# EAGLE board Extrudrboard (EAGLE 6.2)
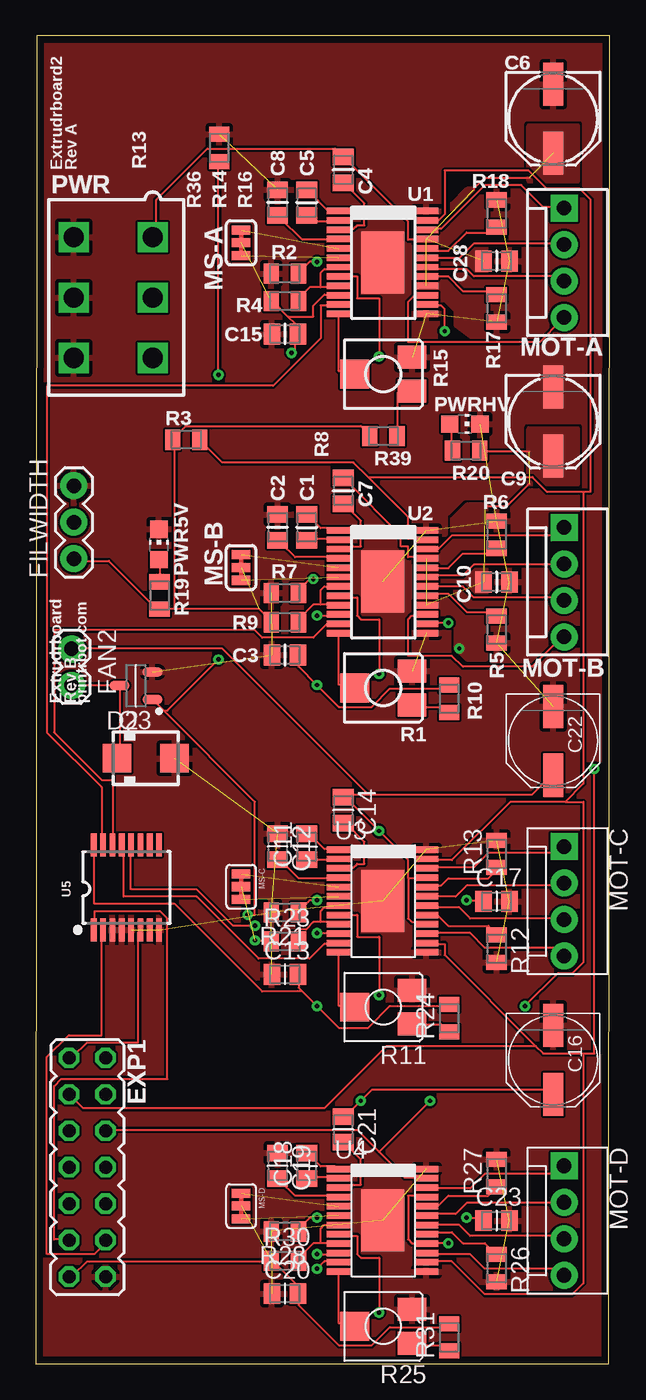
[diagram p0: board, top side]
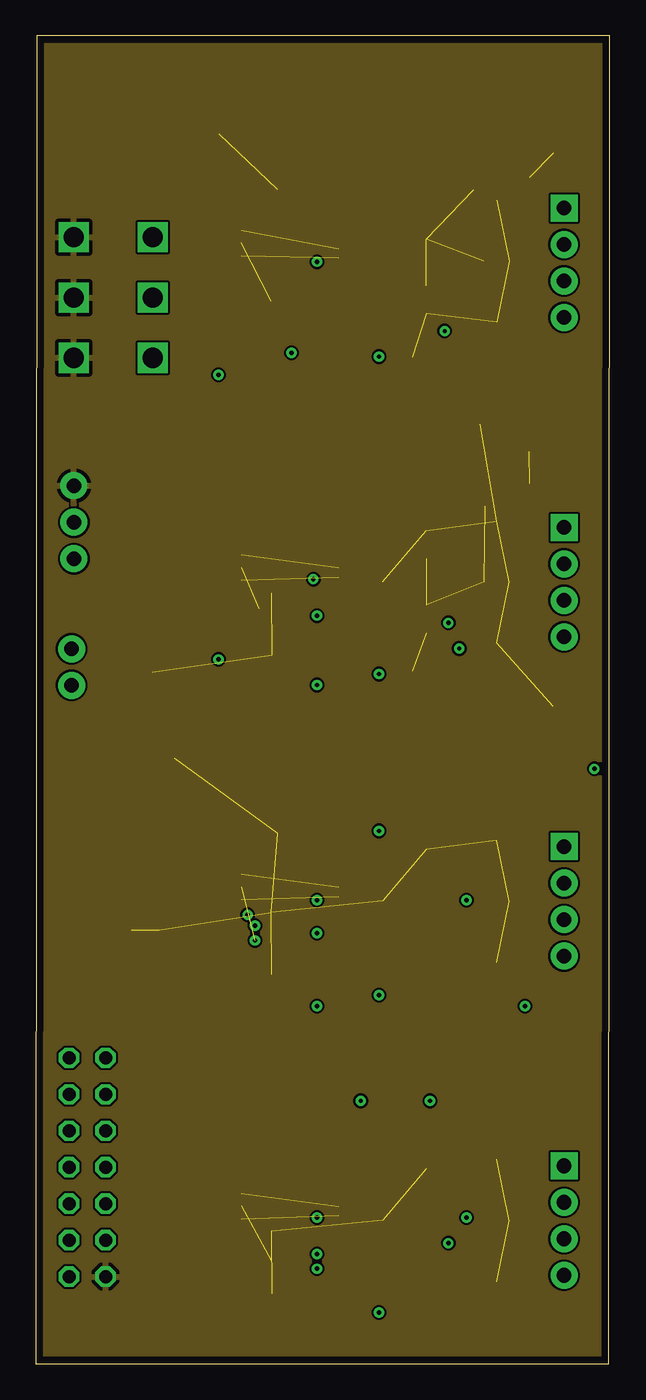
[diagram p1: board, inner layer GND]
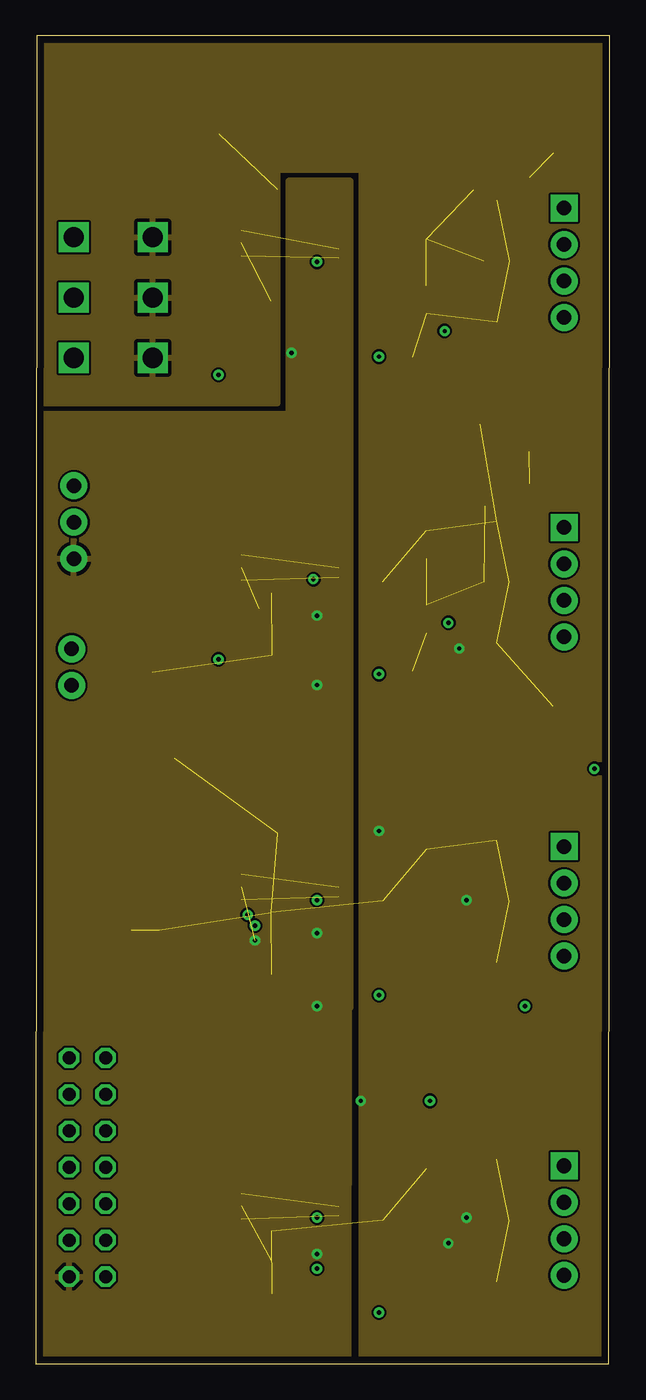
[diagram p2: board, inner layer PWR]
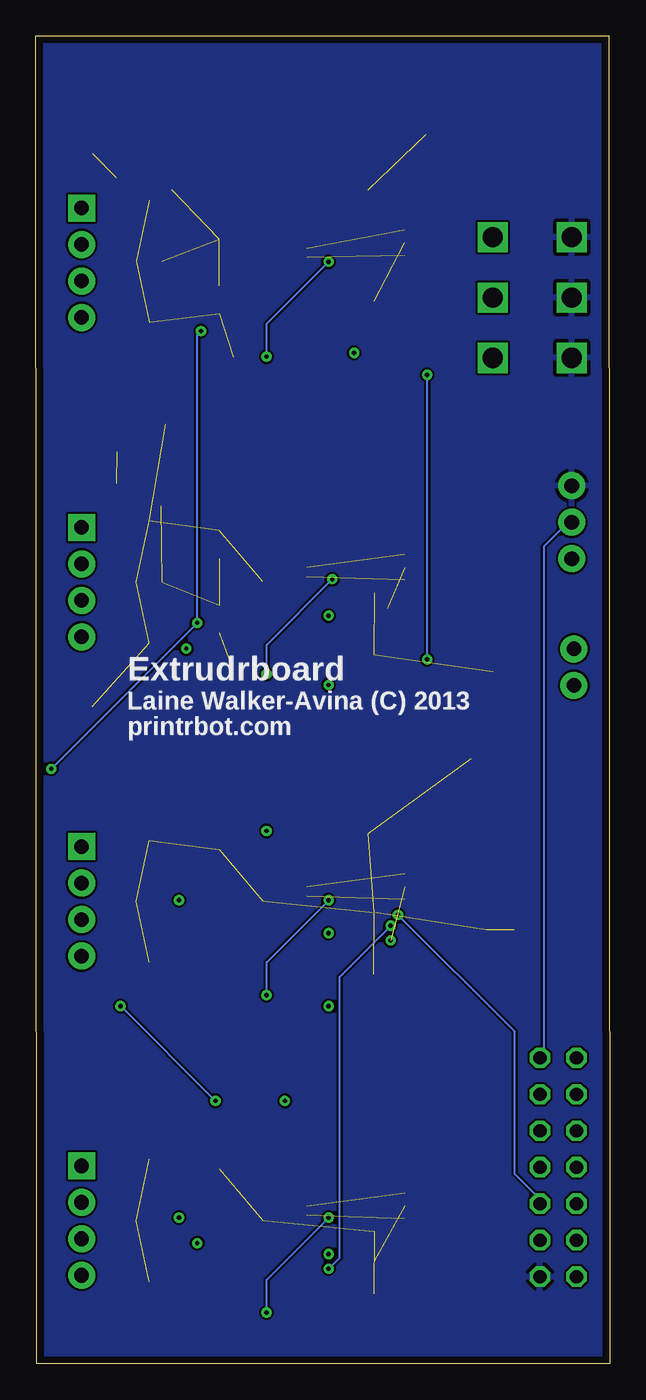
[diagram p3: board, bottom side, seen from below]

Size 39.93 x 92.43 mm. Coordinates in mm from the lower left corner, seen from the top.
Outline: 0,0 39.88,0 39.93,92.43 0.05,92.43 0,0
Copper layers (1*2+3*16): Top 0.035mm / dielectric 0.6mm / GND 0.035mm / dielectric 0.2mm / PWR 0.035mm / dielectric 0.6mm / Bottom 0.035mm
Design rules: minimum track width 6mil, minimum drill 12mil, track to track 6mil, track to pad 7mil, pad to pad 6mil, via to via 6mil, smd to smd 0mil, copper to edge 20mil, drill to drill 10mil, minimum pad ring 10mil, minimum via ring 8mil, stop-mask expansion 6mil, vias tented up to drill 100mil, thermal gap 10mil

## Footprints (pad centres in the part's own frame; a part is rotated, then mirrored left to right if it is on the bottom)
CAPC2012X145AN = smd 1.15 x 1.45: 1 -0.9,0; 2 0.9,0
PANASONIC_D = smd 3 x 1.4: + 2.4,0; - -2.4,0
SMA = smd 2 x 2: A 2,0; C -2,0
JP7Q = drill 0.914 octagon: 1 -7.62,-1.27; 2 -7.62,1.27; 3 -5.08,-1.27; 4 -5.08,1.27; 5 -2.54,-1.27; 6 -2.54,1.27; 7 0,-1.27; 8 0,1.27; 9 2.54,-1.27; 10 2.54,1.27; 11 5.08,-1.27; 12 5.08,1.27; 13 7.62,-1.27; 14 7.62,1.27
1X02 = drill 1.016 pad 1.88: 1 0,0; 2 2.54,0
1X03 = drill 1.016 pad 1.88: 1 0,0; 2 2.54,0; 3 5.08,0
MOLEX-1X4 = drill 1.016 pad 1.88 square: 1 0,0 | drill 1.016 pad 1.88: 2 2.54,0; 3 5.08,0; 4 7.62,0
SJ_3_CONNECTED = smd 0.635 x 1.27: 1 -0.889,0; 2 0,0; 3 0.889,0
5566-6 = drill 1.4 square: 1 4.2,-2.75; 2 0,-2.75; 3 -4.2,-2.75; 4 4.2,2.75; 5 0,2.75; 6 -4.2,2.75
CHIP-LED0805 = smd 1.2 x 1.2: A 0,-1.05; C 0,1.05
SOT95P280X135-3N = smd 1.4 x 0.65: 1 -1.15,0.95; 2 -1.15,-0.95; 3 1.15,0
RTRIM-ST4ETB = smd 1.6 x 2: 1 -1.175,-2; 2 1.175,-2 | smd 2 x 2: W 0,2
RESC2012X70N = smd 1.05 x 1.4: 1 -0.95,0; 2 0.95,0
TSSOP-24 = smd 0.45 x 1.65: 1 -3.6,-3.1; 2 -2.95,-3.1; 3 -2.3,-3.1; 4 -1.65,-3.1; 5 -1,-3.1; 6 -0.35,-3.1; 7 0.3,-3.1; 8 0.95,-3.1; 9 1.6,-3.1; 10 2.25,-3.1; 11 2.9,-3.1; 12 3.55,-3.1; 13 3.55,3; 14 2.9,3; 15 2.25,3; 16 1.6,3; 17 0.95,3; 18 0.3,3; 19 -0.35,3; 20 -1,3; 21 -1.65,3; 22 -2.3,3; 23 -2.95,3; 24 -3.6,3 | smd 4.32 x 3: PAD -0.025,-0.05
TSSOP16 = smd 0.4 x 1.6: 1 -2.225,-2.85; 2 -1.575,-2.85; 3 -0.925,-2.85; 4 -0.275,-2.85; 5 0.375,-2.85; 6 1.025,-2.85; 7 1.675,-2.85; 8 2.325,-2.85; 9 2.325,3.05; 10 1.675,3.05; 11 1.025,3.05; 12 0.375,3.05; 13 -0.275,3.05; 14 -0.925,3.05; 15 -1.575,3.05; 16 -2.225,3.05

## Placement (x,y rotation side)
C1  0.1uF  [CAPC2012X145AN]  18.85,58.22 90 top
C2  0.22uF  [CAPC2012X145AN]  16.81,58.22 270 top
C3  10uF  [CAPC2012X145AN]  17.32,49.33 0 top
C4  0.1uF  [CAPC2012X145AN]  21.39,83.11 270 top
C5  0.1uF  [CAPC2012X145AN]  18.85,80.82 90 top
C6  100uF  [PANASONIC_D]  35.99,86.66 270 top
C7  0.1uF  [CAPC2012X145AN]  21.39,60.76 270 top
C8  0.22uF  [CAPC2012X145AN]  16.81,80.82 270 top
C9  100uF  [PANASONIC_D]  35.99,65.58 270 top
C10  0.1uF  [CAPC2012X145AN]  32.05,54.41 0 top
C11  0.1uF  [CAPC2012X145AN]  18.85,35.99 90 top
C12  0.22uF  [CAPC2012X145AN]  16.81,35.99 270 top
C13  10uF  [CAPC2012X145AN]  17.32,27.1 0 top
C14  0.1uF  [CAPC2012X145AN]  21.39,38.53 270 top
C15  10uF  [CAPC2012X145AN]  17.32,71.68 0 top
C16  100uF  [PANASONIC_D]  35.99,21.13 270 top
C17  0.1uF  [CAPC2012X145AN]  32.05,32.18 0 top
C18  0.1uF  [CAPC2012X145AN]  18.85,13.77 90 top
C19  0.22uF  [CAPC2012X145AN]  16.81,13.77 270 top
C20  10uF  [CAPC2012X145AN]  17.32,4.88 0 top
C21  0.1uF  [CAPC2012X145AN]  21.39,16.31 270 top
C22  100uF  [PANASONIC_D]  35.99,43.36 270 top
C23  0.1uF  [CAPC2012X145AN]  32.05,9.96 0 top
C28  0.1uF  [CAPC2012X145AN]  32.05,76.76 0 top
D2  [SMA]  7.65,42.14 0 top
EXP1  PB-E1  [JP7Q]  3.58,13.67 270 top
FAN2  FAN  [1X02]  2.49,49.76 270 top
FILWIDTH  FILWIDTH  [1X03]  2.64,56.03 90 top
MOT-A  MOT-A  [MOLEX-1X4]  36.75,80.44 270 top
MOT-B  MOT-B  [MOLEX-1X4]  36.75,58.22 270 top
MOT-C  MOT-C  [MOLEX-1X4]  36.75,35.99 270 top
MOT-D  MOT-D  [MOLEX-1X4]  36.75,13.77 270 top
MS-A  [SJ_3_CONNECTED]  14.27,78.03 270 top
MS-B  [SJ_3_CONNECTED]  14.27,55.42 270 top
MS-C  [SJ_3_CONNECTED]  14.27,33.2 270 top
MS-D  [SJ_3_CONNECTED]  14.27,10.97 270 top
PWR  5566-6  [5566-6]  5.38,74.22 90 top
PWR5V  PWR  [CHIP-LED0805]  8.56,57.03 0 top
PWRHV  PWR  [CHIP-LED0805]  29.86,65.41 270 top
Q3  RFP30N06LE  [SOT95P280X135-3N]  6.96,47.19 180 top
R1  10k  [RTRIM-ST4ETB]  24.18,47.04 90 top
R2  10k  [RESC2012X70N]  17.32,75.87 180 top
R3  100k  [RESC2012X70N]  10.46,64.31 0 top
R4  100k  [RESC2012X70N]  17.32,73.96 0 top
R5  0.11  [RESC2012X70N]  32.05,51.1 270 top
R6  0.11  [RESC2012X70N]  32.05,57.71 90 top
R7  10k  [RESC2012X70N]  17.32,53.64 180 top
R9  100k  [RESC2012X70N]  17.32,51.61 0 top
R10  20k  [RESC2012X70N]  28.75,46.28 90 top
R11  10k  [RTRIM-ST4ETB]  24.18,24.82 90 top
R12  0.11  [RESC2012X70N]  32.05,28.88 270 top
R13  0.11  [RESC2012X70N]  32.05,35.48 90 top
R14  100k  [RESC2012X70N]  12.75,84.63 90 top
R15  10k  [RTRIM-ST4ETB]  24.18,68.88 90 top
R17  0.11  [RESC2012X70N]  32.05,73.46 270 top
R18  0.11  [RESC2012X70N]  32.05,80.06 90 top
R19  330  [RESC2012X70N]  8.6,53.48 270 top
R20  1k  [RESC2012X70N]  29.94,63.55 0 top
R21  10k  [RESC2012X70N]  17.32,31.42 180 top
R23  100k  [RESC2012X70N]  17.32,29.39 0 top
R24  20k  [RESC2012X70N]  28.75,24.05 90 top
R25  10k  [RTRIM-ST4ETB]  24.18,2.59 90 top
R26  0.11  [RESC2012X70N]  32.05,6.65 270 top
R27  0.11  [RESC2012X70N]  32.05,13.26 90 top
R28  10k  [RESC2012X70N]  17.32,9.19 180 top
R30  100k  [RESC2012X70N]  17.32,7.16 0 top
R31  20k  [RESC2012X70N]  28.75,1.83 90 top
R39  20k  [RESC2012X70N]  24.18,64.57 180 top
U1  A4982  [TSSOP-24]  24.18,76.63 270 top
U2  A4982  [TSSOP-24]  24.18,54.41 270 top
U3  A4982  [TSSOP-24]  24.18,32.18 270 top
U4  A4982  [TSSOP-24]  24.18,9.96 270 top
U5  MC74HC238ADTR2G  [TSSOP16]  6.25,33.05 0 top

## Library data of the parts
C1-C5 C7 C8 C10-C15 C17-C21 C23 C28 = ipc-7351-capacitor
C6 C9 C16 C22 = rcl
D2 EXP1 MS-A MS-B MS-C MS-D R1 R11 R15 R25 U1-U4 = printrbot
FAN2 FILWIDTH MOT-A MOT-B MOT-C MOT-D = SparkFun
PWR = printrbot; MPN: 95566-61002; OC_FARNELL: unknown; OC_NEWARK: 22K8620
PWR5V PWRHV = led
Q3 = ipc-7351-transistor
R2-R7 R9 R10 R12-R14 R17-R21 R23 R24 R26-R28 R30 R31 R39 = ipc-7351-resistor
U5 = mux

## Nets
12V: C4.1 C6.+ C7.1 C9.+ C10.1 C14.1 C16.+ C17.1 C21.1 C22.+ C23.1 C28.1 FAN2.1 PWR.1 PWR.2 PWR.3 R20.2 U1.16 U1.21 U2.16 U2.21 U3.16 U3.21 U4.16 U4.21
!E-ENABLE: EXP1.6 R3.2 U1.23 U2.23 U3.23 U4.23
!PWM-FAN2: EXP1.10 Q3.1 R14.1
+5V [power]: C3.2 C13.2 C15.2 C20.2 EXP1.13 FILWIDTH.1 MS-A.2 MS-B.2 MS-C.2 MS-D.2 R3.1 R4.1 R9.1 R10.2 R19.2 R23.1 R24.2 R30.1 R31.2 R39.2 U1.10 U2.10 U3.10 U4.10 U5.16
A-STEP: U1.11 U5.15
B-STEP: U2.11 U5.14
C-STEP: U3.11 U5.13
D-STEP: U4.11 U5.12
E-DIR: EXP1.3 U1.14 U2.14 U3.14 U4.14
E-MUX0: EXP1.11 U5.1
E-MUX1: EXP1.12 U5.2
E-STEP: EXP1.1 U5.6
FILWIDTH: EXP1.2 FILWIDTH.2
GND [power]: C2.1 C3.1 C6.- C8.1 C9.- C10.2 C12.1 C13.1 C15.1 C16.- C17.2 C19.1 C20.1 C22.- C23.2 C28.2 D2.A EXP1.14 FILWIDTH.3 PWR5V.C PWR.4 PWR.5 PWR.6 PWRHV.C Q3.2 R1.2 R2.2 R5.2 R6.2 R7.2 R11.2 R12.2 R13.2 R14.2 R15.2 R17.2 R18.2 R21.2 R25.2 R26.2 R27.2 R28.2 U1.13 U1.24 U1.PAD U2.13 U2.24 U2.PAD U3.13 U3.24 U3.PAD U4.13 U4.24 U4.PAD U5.3 U5.4 U5.5 U5.8
N$1: C1.2 U2.1
N$2: C1.1 U2.2
N$3: R5.1 U2.17
N$4: R6.1 U2.20
N$5: R1.W U2.12
N$6: R7.1 U2.8
N$7: C2.2 U2.4
N$8: R9.2 U2.7 U2.9
N$9: C7.2 U2.3
N$10: MOT-A.3 U1.18
N$11: C5.2 U1.1
N$12: C5.1 U1.2
N$13: R2.1 U1.8
N$14: R17.1 U1.17
N$15: R18.1 U1.20
N$16: C4.2 U1.3
N$17: MOT-A.4 U1.15
N$18: R15.W U1.12
N$19: C8.2 U1.4
N$20: MOT-A.2 U1.19
N$21: R4.2 U1.7 U1.9
N$22: MS-B.1 U2.5
N$23: MOT-A.1 U1.22
N$24: MS-B.3 U2.6
N$25: MOT-B.3 U2.18
N$26: MOT-B.4 U2.15
N$27: MS-A.1 U1.5
N$28: MS-A.3 U1.6
N$29: MOT-B.2 U2.19
N$30: MOT-B.1 U2.22
N$31: R1.1 R10.1
N$33: PWR5V.A R19.1
N$34: PWRHV.A R20.1
N$35: C11.2 U3.1
N$36: C11.1 U3.2
N$37: R12.1 U3.17
N$38: R13.1 U3.20
N$39: R11.W U3.12
N$40: R21.1 U3.8
N$41: C12.2 U3.4
N$42: R23.2 U3.7 U3.9
N$43: C14.2 U3.3
N$44: MS-C.1 U3.5
N$45: MS-C.3 U3.6
N$46: MOT-C.3 U3.18
N$47: MOT-C.4 U3.15
N$48: MOT-C.2 U3.19
N$49: MOT-C.1 U3.22
N$50: R11.1 R24.1
N$51: C18.2 U4.1
N$52: C18.1 U4.2
N$53: R26.1 U4.17
N$54: R27.1 U4.20
N$55: R25.W U4.12
N$56: R28.1 U4.8
N$57: C19.2 U4.4
N$58: R30.2 U4.7 U4.9
N$59: C21.2 U4.3
N$60: MS-D.1 U4.5
N$61: MS-D.3 U4.6
N$62: MOT-D.3 U4.18
N$63: MOT-D.4 U4.15
N$64: MOT-D.2 U4.19
N$65: MOT-D.1 U4.22
N$66: R25.1 R31.1
N$67: D2.C FAN2.2 Q3.3
N$69: R15.1 R39.1

## Tracks (layer width: path | path; a pad name or v marks a point on that pad's centre or on a via)
12V  (via drill 0.3)  (8 unrouted)
  Top 0.152: 25.91,33.78 25.91,35.05 v23.88,37.08 21.59,39.37 C14.1 21.59,39.62 23.11,39.62 | 25.91,33.78 27.18,33.78 U3.21 | 25.91,33.78 25.91,30.99 26.16,30.73 27.18,30.73 U3.16 | 23.11,39.62 34.54,39.62 35.81,40.89 C22.+ | 23.11,39.62 12.95,49.78 2.54,49.78 FAN2.1 | C21.1 21.59,17.27 v22.61,18.29 23.37,19.05 35.56,19.05 35.81,18.8 C16.+ | R20.2 30.99,63.5 34.29,63.5 34.34,63.5 | C7.1 21.59,61.47 25.4,57.66 25.4,56.9 25.91,56.9 25.91,56.13 26.42,56.13 U2.21 | 31.24,59.69 32.77,59.69 34.29,61.21 34.34,61.27 | U1.21 26.42,78.23 25.91,78.23 25.91,79.5 21.59,83.82 C4.1 21.34,84.07 20.83,84.58 11.94,84.58 8.38,81.03 8.38,78.49 PWR.1 | 34.34,82.55 34.29,82.55 31.24,82.55 30.48,81.79 30.48,81.71 | U4.21 27.18,11.68 25.91,11.68 25.91,8.64 26.16,8.38 27.18,8.38 U4.16 27.43,8.38 v28.7,8.38 | v29.97,10.16 30.99,10.16 C23.1 | v29.97,32.26 30.99,32.26 C17.1
  PWR 0.152: v22.61,18.29 22.66,18.29
  other vias: 29.46,49.78
  pour PWR: 0.05,66.85 16.81,66.85 16.81,83.11 22.66,83.11 22.66,0 39.93,0 39.93,92.43 0.05,92.43
  pour Top (no thermals): 31.29,59.74 30.02,59.74 29.01,58.72 29.01,57.2 28.5,56.69 26.47,56.69 26.47,52.12 28.5,52.12 29.26,51.36 29.26,49.83 30.02,49.07 31.29,49.07
  pour Top (no thermals): 31.29,81.71 30.02,81.71 29.01,80.7 29.01,79.17 28.5,78.66 26.47,78.66 26.47,74.09 28.5,74.09 29.26,73.33 29.26,72.31 30.28,71.55 31.29,71.55
  pour Top (no thermals): 34.34,65.07 37.64,65.07 37.64,61.26 34.34,61.26
  pour Top (no thermals): 34.34,86.16 37.64,86.16 37.64,82.35 34.34,82.35
!E-ENABLE  (via drill 0.3)
  Top 0.152: 23.88,14.73 22.35,16.26 5.08,16.26 EXP1.6 | 23.88,14.73 25.65,12.95 27.18,12.95 U4.23 | 23.11,61.72 25.91,58.93 25.91,57.4 27.18,57.4 U2.23 | 23.11,61.72 22.1,62.74 12.95,62.74 11.43,64.26 R3.2 | 36.83,39.12 33.02,39.12 28.96,35.05 27.43,35.05 U3.23 | 36.83,39.12 38.1,40.39 38.1,60.71 | 38.1,60.71 35.56,60.71 34.54,61.72 23.11,61.72 | 38.1,60.71 38.61,60.71 38.61,81.03 37.85,81.79 35.56,81.79 34.29,83.06 28.45,83.06 28.45,80.01 27.94,79.5 27.43,79.5 U1.23 | v27.43,18.29 23.88,14.73 | v34.04,24.89 36.32,27.18 37.34,27.18 38.1,27.94 38.1,39.12 36.83,39.12
  Bottom 0.152: v34.04,24.89 v27.43,18.29
!PWM-FAN2  (via drill 0.3)
  Top 0.152: 8.89,45.47 15.24,39.12 15.24,31.24 v14.73,31.24 | 8.89,45.47 8.13,46.23 Q3.1 | v12.7,68.83 12.7,83.57 R14.1 | v12.7,49.02 9.14,45.47 8.89,45.47
  Bottom 0.152: v14.73,31.24 6.6,23.11 6.6,13.21 5.08,11.68 5.08,11.18 EXP1.10 | v12.7,49.02 v12.7,68.83
+5V  (via drill 0.3)  (4 unrouted)
  Top 0.152: 18.54,25.91 18.29,26.16 18.29,26.92 C13.2 | 18.54,25.91 v19.56,24.89 21.08,23.37 23.11,23.37 24.64,24.89 28.7,24.89 R24.2 | 18.54,25.91 15.75,25.91 9.65,32 4.06,32 4.06,36.07 U5.16 | R31.2 28.7,2.54 24.64,2.54 23.37,1.27 21.08,1.27 18.29,4.06 18.29,4.83 C20.2 18.03,5.08 18.03,5.59 16.51,7.11 R30.1 16.26,7.11 3.56,7.11 2.54,6.1 EXP1.13 | R10.2 28.7,46.99 24.64,46.99 23.37,45.72 21.08,45.72 v19.56,47.24 18.29,48.51 18.29,49.28 C3.2 | 17.53,72.9 18.03,72.39 18.03,71.88 C15.2 18.03,71.63 18.03,70.36 v17.78,70.36 | 17.53,72.9 16.51,73.91 R4.1 | 17.53,72.9 19.3,72.9 19.3,73.66 20.07,74.42 20.83,74.42 U1.10 | FILWIDTH.1 2.79,55.88 5.08,55.88 8.38,52.58 R19.2 8.64,52.58 9.65,52.58 | 9.65,52.58 9.65,64.26 R3.1 9.65,64.52 10.41,65.28 22.61,65.28 23.11,64.77 R39.2 | v15.24,29.46 16.26,29.46 R23.1 | 9.65,52.58 15.49,52.58 16.26,51.82 R9.1 | v19.56,7.62 20.83,7.62 U4.10 | v19.56,29.97 20.83,29.97 U3.10 | v19.56,52.07 20.83,52.07 U2.10
  pour PWR: 17.58,82.35 17.58,66.09 0.05,66.09 0,0 21.77,0 21.82,24.79 21.89,24.79 21.89,82.35
A-STEP
  Top 0.152: U5.15 4.57,36.32 4.57,40.13 0.76,43.94 0.76,68.07 16.51,68.07 19.81,71.37 19.81,73.66 20.83,73.66 U1.11
B-STEP
  Top 0.152: U5.14 5.33,36.32 5.33,40.64 4.57,40.64 1.27,43.94 1.27,51.05 15.24,51.05 15.75,50.55 19.3,50.55 20.32,51.56 20.83,51.56 U2.11
C-STEP
  Top 0.152: U5.13 6.1,36.07 6.1,32.51 11.18,32.51 15.49,28.19 19.05,28.19 20.07,29.21 20.83,29.21 U3.11
D-STEP  (via drill 0.3)
  Top 0.152: v15.24,30.48 13.72,30.48 11.18,33.02 6.6,33.02 6.6,36.07 U5.12 | v19.56,6.6 20.07,7.11 20.83,7.11 U4.11
  Bottom 0.152: v15.24,30.48 18.8,26.92 18.8,7.37 v19.56,6.6
E-DIR  (via drill 0.3)
  Top 0.152: 38.1,21.59 38.1,5.59 37.34,4.83 31.24,4.83 28.96,7.11 27.43,7.11 U4.14 | 38.1,21.59 35.31,21.59 34.8,22.1 | 34.8,22.1 28.45,28.45 28.45,29.21 27.43,29.21 U3.14 | v28.7,51.56 27.43,51.56 U2.14 | v38.86,41.4 38.86,21.59 38.1,21.59 | v28.45,71.88 28.45,73.41 28.19,73.66 27.43,73.66 U1.14 | 34.8,22.1 24.38,22.1 20.07,17.78 3.3,17.78 2.54,18.54 EXP1.3
  Bottom 0.152: v38.86,41.4 v28.7,51.56 28.7,71.63 v28.45,71.88
E-MUX0
  Top 0.152: U5.1 4.06,30.23 4.06,31.5 8.64,31.5 9.14,30.99 9.14,19.81 1.78,19.81 1.27,19.3 1.27,8.64 2.29,8.64 EXP1.11
E-MUX1
  Top 0.152: U5.2 4.57,29.97 4.57,22.86 2.29,22.86 0.76,21.34 0.76,7.62 4.06,7.62 4.83,8.38 EXP1.12
E-STEP
  Top 0.152: U5.6 7.11,29.97 7.11,22.35 3.56,22.35 2.54,21.34 EXP1.1
FILWIDTH
  Bottom 0.152: EXP1.2 4.83,21.34 4.57,21.59 4.57,56.9 2.79,58.67 FILWIDTH.2
GND  (29 unrouted)
  Top 0.152: 5.33,30.23 U5.3 5.33,30.23
  pour Top (rank 5): 0.05,92.43 39.93,92.43 39.88,0 0,0
  pour Bottom (rank 5): 0.05,92.43 39.93,92.43 39.88,0 0,0
  pour GND: 0.05,92.43 39.93,92.43 39.88,0 0,0
  pour Top (no thermals): 34.34,69.65 37.64,69.65 37.64,66.34 34.34,66.34
N$1
  Top 0.152: C1.2 19.05,58.93 19.81,58.17 20.83,58.17 U2.1
N$2
  Top 0.152: C1.1 19.05,57.4 20.83,57.4 U2.2
N$3
  Top 0.152: R5.1 32,52.07 31.75,52.32 29.97,52.32 28.7,53.59 27.43,53.59 U2.17
N$4
  Top 0.152: R6.1 32,56.64 31.75,56.39 29.72,56.39 28.7,55.37 27.43,55.37 U2.20
N$5
  Top 0.152: U2.12 21.08,50.8 21.08,47.24 22.1,47.24 R1.W
N$6  (via drill 0.3)
  Top 0.152: v19.3,54.61 19.05,54.61 18.29,53.85 R7.1 | v23.88,48.01 23.88,51.82 22.61,51.82 22.35,52.07 22.35,53.34 21.08,53.34 U2.8
  Bottom 0.152: v19.3,54.61 23.88,50.04 v23.88,48.01
N$7
  Top 0.152: C2.2 17.02,57.15 18.03,56.13 20.83,56.13 U2.4
N$8
  Top 0.152: 19.81,52.83 20.83,52.83 U2.9 | 19.81,52.83 19.3,52.83 18.29,51.82 R9.2 | 19.81,52.83 19.81,53.85 20.07,54.1 20.83,54.1 U2.7
N$9
  Top 0.152: C7.2 21.59,59.69 22.61,58.67 22.61,56.9 22.1,56.9 21.84,56.64 21.08,56.64 U2.3
N$10
  Top 0.152: U1.18 27.43,76.2 29.97,76.2 30.48,75.69 36.32,75.69 36.58,75.44 MOT-A.3
N$11
  Top 0.152: C5.2 19.05,81.53 20.32,80.26 20.83,80.26 U1.1
N$12
  Top 0.152: C5.1 19.05,79.76 19.3,79.5 20.83,79.5 U1.2
N$13  (via drill 0.3)
  Top 0.152: v19.56,76.71 19.05,76.71 18.29,75.95 R2.1 | v23.88,70.1 23.88,74.17 22.35,74.17 22.35,75.69 21.08,75.69 U1.8
  Bottom 0.152: v19.56,76.71 23.88,72.39 v23.88,70.1
N$14
  Top 0.152: R17.1 32,74.42 31.75,74.68 29.72,74.68 28.7,75.69 27.43,75.69 U1.17
N$15
  Top 0.152: R18.1 32,78.99 31.75,78.74 29.97,78.74 28.7,77.47 27.43,77.47 U1.20
N$16
  Top 0.152: C4.2 21.59,82.04 22.86,80.77 22.86,79.25 22.35,79.25 22.1,78.99 21.08,78.99 U1.3
N$17
  Top 0.152: U1.15 27.18,74.42 26.42,74.42 25.91,73.91 25.91,71.12 35.05,71.12 36.58,72.64 MOT-A.4
N$18
  Top 0.152: U1.12 21.08,72.9 21.08,69.09 22.1,69.09 R15.W
N$19
  Top 0.152: C8.2 17.02,79.76 18.54,78.23 20.83,78.23 U1.4
N$20
  Top 0.152: U1.19 27.43,76.96 29.46,76.96 30.48,77.98 36.58,77.98 MOT-A.2
N$21
  Top 0.152: 19.81,74.93 20.83,74.93 U1.9 | 19.81,74.93 19.05,74.93 18.29,74.17 R4.2 | 19.81,74.93 19.81,75.95 20.07,76.2 20.83,76.2 U1.7
N$22  (1 unrouted)
N$23
  Top 0.152: U1.22 27.43,78.99 28.19,78.99 31.24,82.04 33.78,82.04 35.31,80.52 36.58,80.52 MOT-A.1
N$24  (1 unrouted)
N$25
  Top 0.152: U2.18 27.43,54.1 29.72,54.1 30.48,53.34 36.58,53.34 MOT-B.3
N$26
  Top 0.152: U2.15 27.18,52.07 26.16,52.07 25.91,51.82 25.91,49.28 28.96,49.28 29.72,48.51 34.54,48.51 36.58,50.55 MOT-B.4
N$27  (1 unrouted)
N$28  (1 unrouted)
N$29
  Top 0.152: U2.19 27.43,54.86 29.72,54.86 30.48,55.63 36.58,55.63 MOT-B.2
N$30
  Top 0.152: U2.22 27.43,56.64 27.94,56.64 28.96,57.66 36.07,57.66 36.58,58.17 MOT-B.1
N$31
  Top 0.152: R10.1 28.7,45.47 28.45,45.72 26.42,45.72 R1.1
N$33
  Top 0.152: PWR5V.A 8.64,55.88 8.64,54.61 R19.1
N$34
  Top 0.152: PWRHV.A 28.96,65.28 28.96,63.75 R20.1
N$35
  Top 0.152: C11.2 19.05,36.83 20.07,35.81 20.83,35.81 U3.1
N$36
  Top 0.152: C11.1 19.05,35.05 20.83,35.05 U3.2
N$37
  Top 0.152: R12.1 32,29.97 31.5,30.48 28.7,30.48 27.94,31.24 27.43,31.24 U3.17
N$38
  Top 0.152: R13.1 32,34.29 31.5,33.78 28.7,33.78 28.19,33.27 27.43,33.27 U3.20
N$39
  Top 0.152: U3.12 21.08,28.45 21.08,24.89 22.1,24.89 R11.W
N$40  (via drill 0.3)
  Top 0.152: v19.56,32.26 19.05,32.26 18.29,31.5 R21.1 | v23.88,25.65 23.88,29.72 22.35,29.72 22.35,31.24 21.08,31.24 U3.8
  Bottom 0.152: v19.56,32.26 23.88,27.94 v23.88,25.65
N$41
  Top 0.152: C12.2 17.02,35.05 18.29,33.78 20.83,33.78 U3.4
N$42
  Top 0.152: 19.81,30.73 20.83,30.73 U3.9 | 19.81,30.73 19.3,30.73 18.8,30.23 18.29,30.23 18.29,29.46 R23.2 | 19.81,30.73 19.81,31.5 20.07,31.75 20.83,31.75 U3.7
N$43
  Top 0.152: C14.2 21.59,37.59 22.86,36.32 22.86,34.8 22.35,34.8 22.1,34.54 21.08,34.54 U3.3
N$44  (1 unrouted)
N$45  (1 unrouted)
N$46
  Top 0.152: U3.18 27.43,31.75 29.46,31.75 30.23,30.99 36.58,30.99 MOT-C.3
N$47
  Top 0.152: U3.15 27.43,29.97 30.23,29.97 31.24,28.96 36.07,28.96 36.58,28.45 MOT-C.4
N$48
  Top 0.152: U3.19 27.43,32.51 29.21,32.51 29.97,33.27 36.58,33.27 MOT-C.2
N$49
  Top 0.152: U3.22 27.43,34.54 30.48,34.54 31.5,35.56 36.32,35.56 36.58,35.81 MOT-C.1
N$50
  Top 0.152: R24.1 28.7,23.11 28.19,23.62 26.42,23.62 R11.1
N$51
  Top 0.152: C18.2 19.05,14.48 19.81,13.72 20.83,13.72 U4.1
N$52
  Top 0.152: C18.1 19.05,12.95 20.83,12.95 U4.2
N$53
  Top 0.152: R26.1 32,7.62 31.24,8.38 29.72,8.38 28.96,9.14 27.43,9.14 U4.17
N$54
  Top 0.152: R27.1 32,12.19 31.5,11.68 28.7,11.68 27.94,10.92 27.43,10.92 U4.20
N$55
  Top 0.152: U4.12 21.08,6.35 21.08,2.79 22.1,2.79 R25.W
N$56  (via drill 0.3)
  Top 0.152: v19.56,10.16 19.05,10.16 18.29,9.4 R28.1 | v23.88,3.56 23.88,7.37 22.61,7.37 22.35,7.62 22.35,8.89 21.08,8.89 U4.8
  Bottom 0.152: v19.56,10.16 23.88,5.84 v23.88,3.56
N$57
  Top 0.152: C19.2 17.02,12.7 18.03,11.68 20.83,11.68 U4.4
N$58
  Top 0.152: 19.81,8.38 20.83,8.38 U4.9 | 19.81,8.38 19.3,8.38 18.29,7.37 R30.2 | 19.81,8.38 19.81,9.4 20.07,9.65 20.83,9.65 U4.7
N$59
  Top 0.152: C21.2 21.59,15.24 22.61,14.22 22.61,12.45 22.1,12.45 21.84,12.19 21.08,12.19 U4.3
N$60  (1 unrouted)
N$61  (1 unrouted)
N$62
  Top 0.152: U4.18 27.43,9.65 29.46,9.65 30.23,8.89 36.58,8.89 MOT-D.3
N$63
  Top 0.152: U4.15 27.43,7.62 30.23,7.62 31.24,6.6 36.32,6.6 36.58,6.35 MOT-D.4
N$64
  Top 0.152: U4.19 27.43,10.41 29.21,10.41 29.97,11.18 36.58,11.18 MOT-D.2
N$65
  Top 0.152: U4.22 27.43,12.19 30.23,12.19 31.24,13.21 36.07,13.21 36.58,13.72 MOT-D.1
N$66
  Top 0.152: R31.1 28.7,1.02 28.45,1.27 26.42,1.27 R25.1
N$67
  Top 0.152: FAN2.2 2.54,47.24 5.59,47.24 Q3.3 5.84,46.99 5.84,42.16 D2.C
N$69
  Top 0.152: R39.1 25.15,64.77 25.15,67.56 26.16,67.56 R15.1

## Text on the board
bPlace: Extrudrboard | Laine Walker-Avina (C) 2013 | printrbot.com
tNames: Extrudrboard | Rev B | printrbot.com
_tsilk: C6 | Extrudrboard2 | Rev A | R13 | R36 | R14 | R16 | C8 | C5 | R18 | PWR | C4 | U1 | R2 | MS-A | C28 | R4 | C15 | R17 | R15 | MOT-A | PWRHV | R3 | R39 | R8 | R20 | C7 | C9 | PWR5V | C2 | C1 | U2 | R6 | R19 | R7 | MS-B | C10 | R9 | C3 | R5 | MOT-B | R10 | R1 | EXP1
_bsilk: Extrudrboard | Laine Walker-Avina (C) 2013 | printrbot.com